# Altium PCB w31_20172_1st_PCB.PcbDoc
Units mil, origin at the board's own origin, x right, y up, seen from the top; angles counter-clockwise.
Board outline 2025 x 1110 mil, 2 copper layers (Top Layer, Bottom Layer); 10 components, 27 nets, 64 pads, 1 vias.
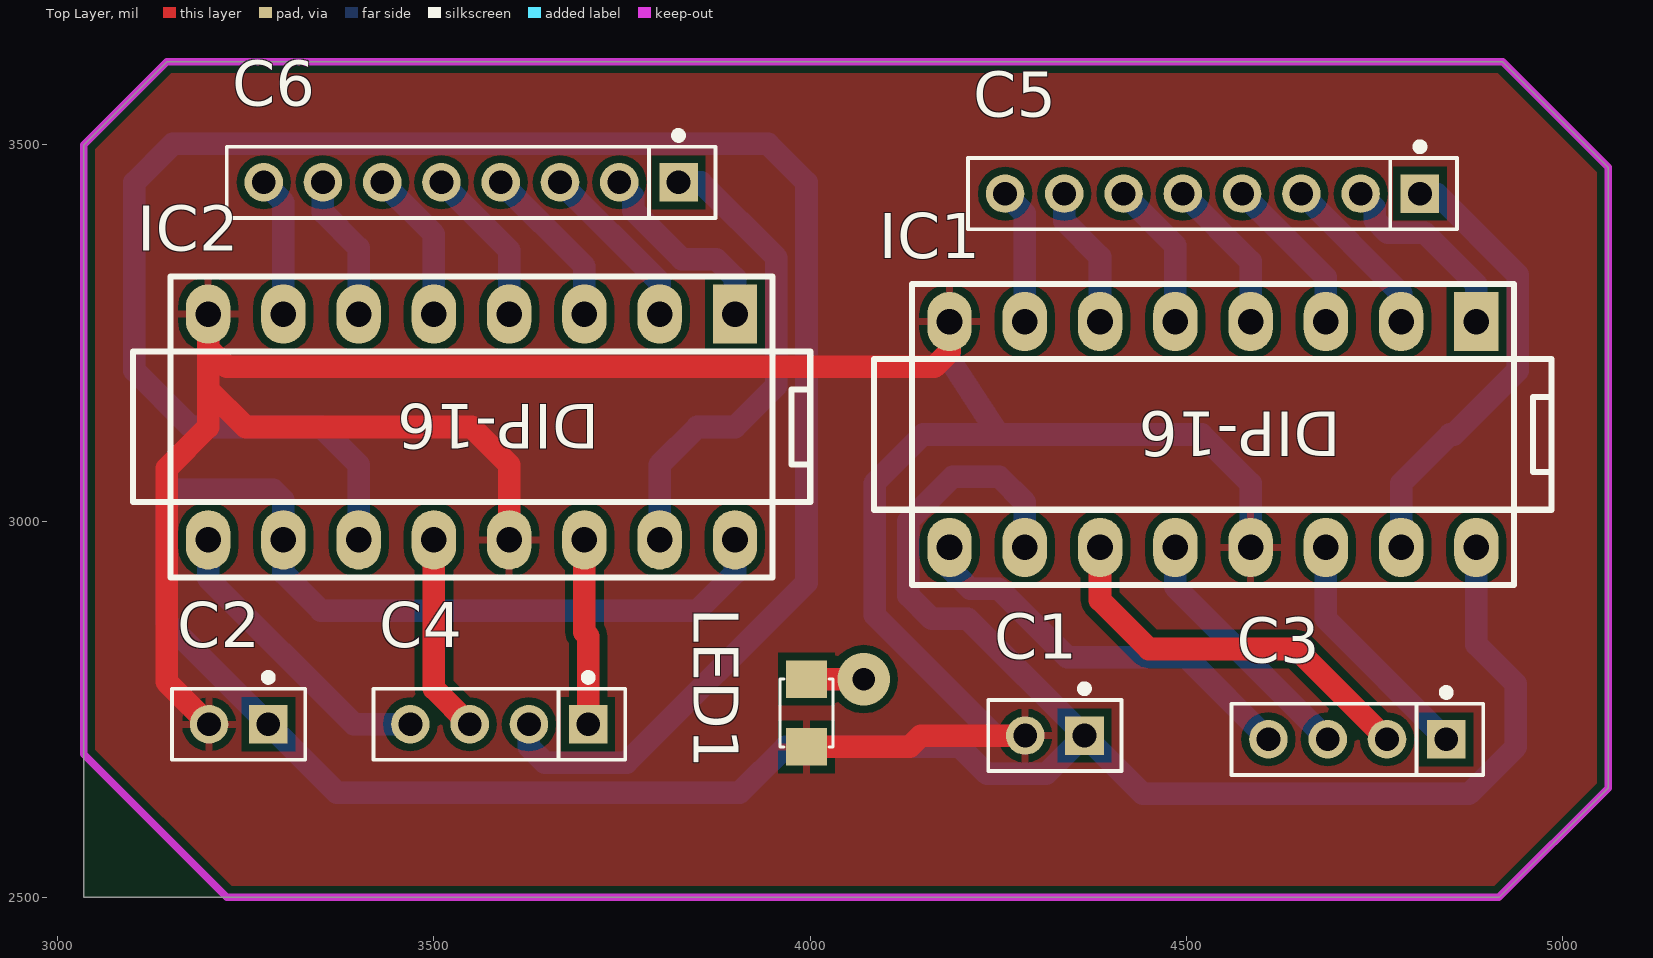
[diagram p0: Top Layer view]
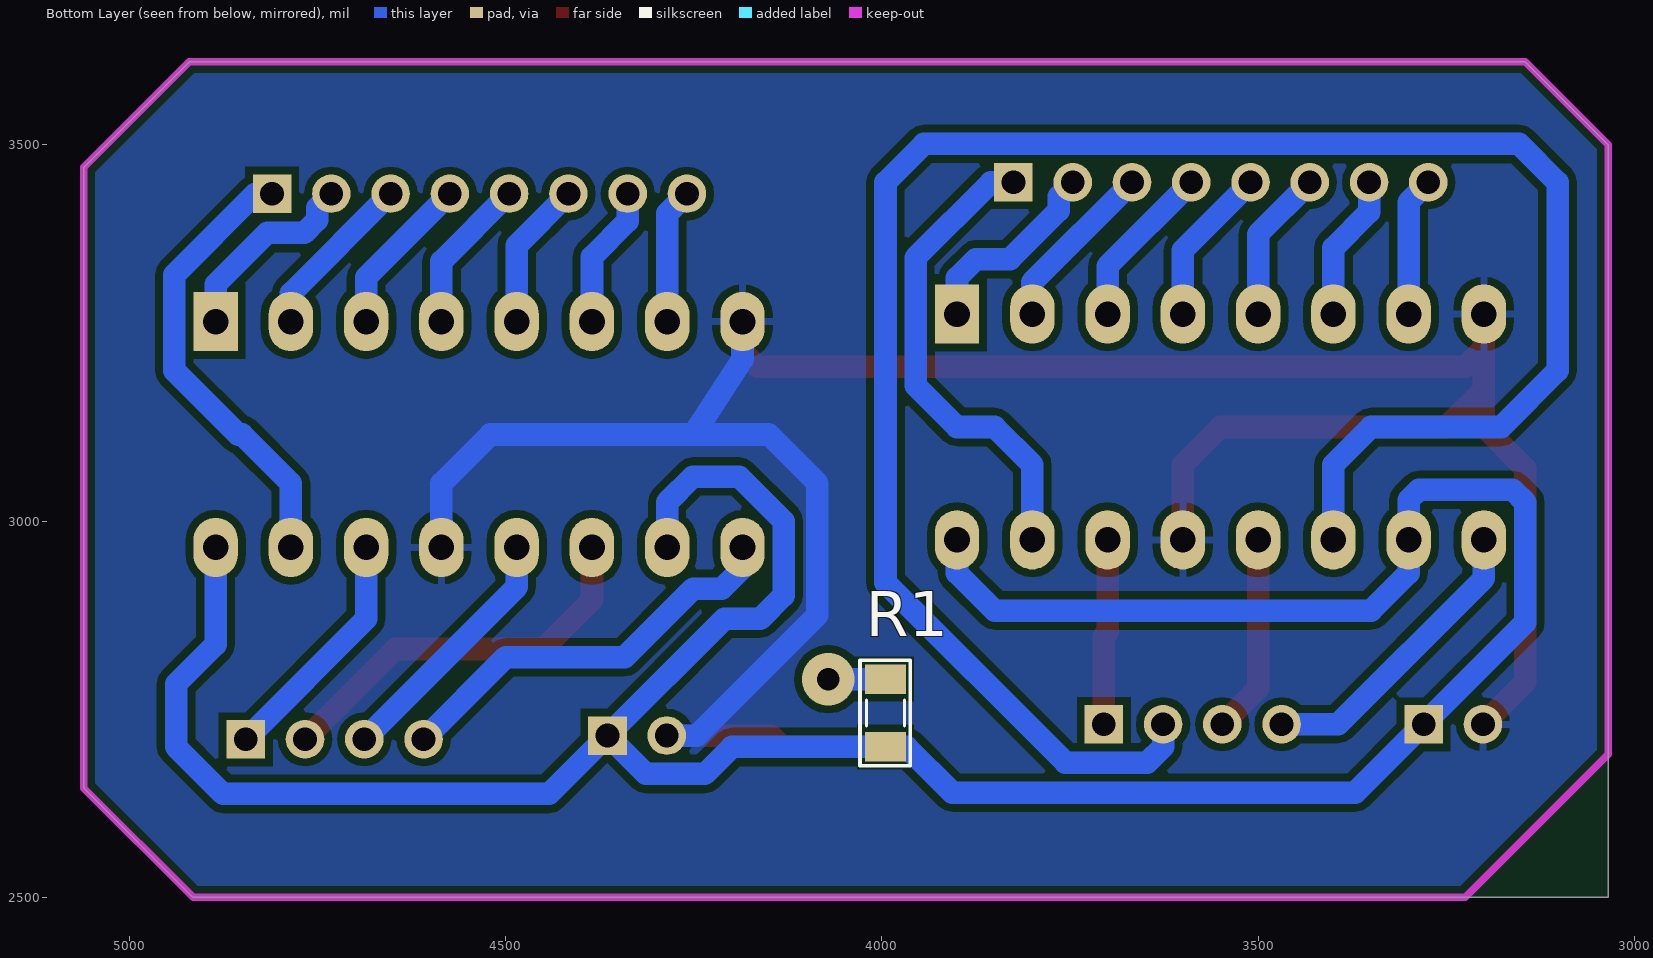
[diagram p1: Bottom Layer view, seen from below]
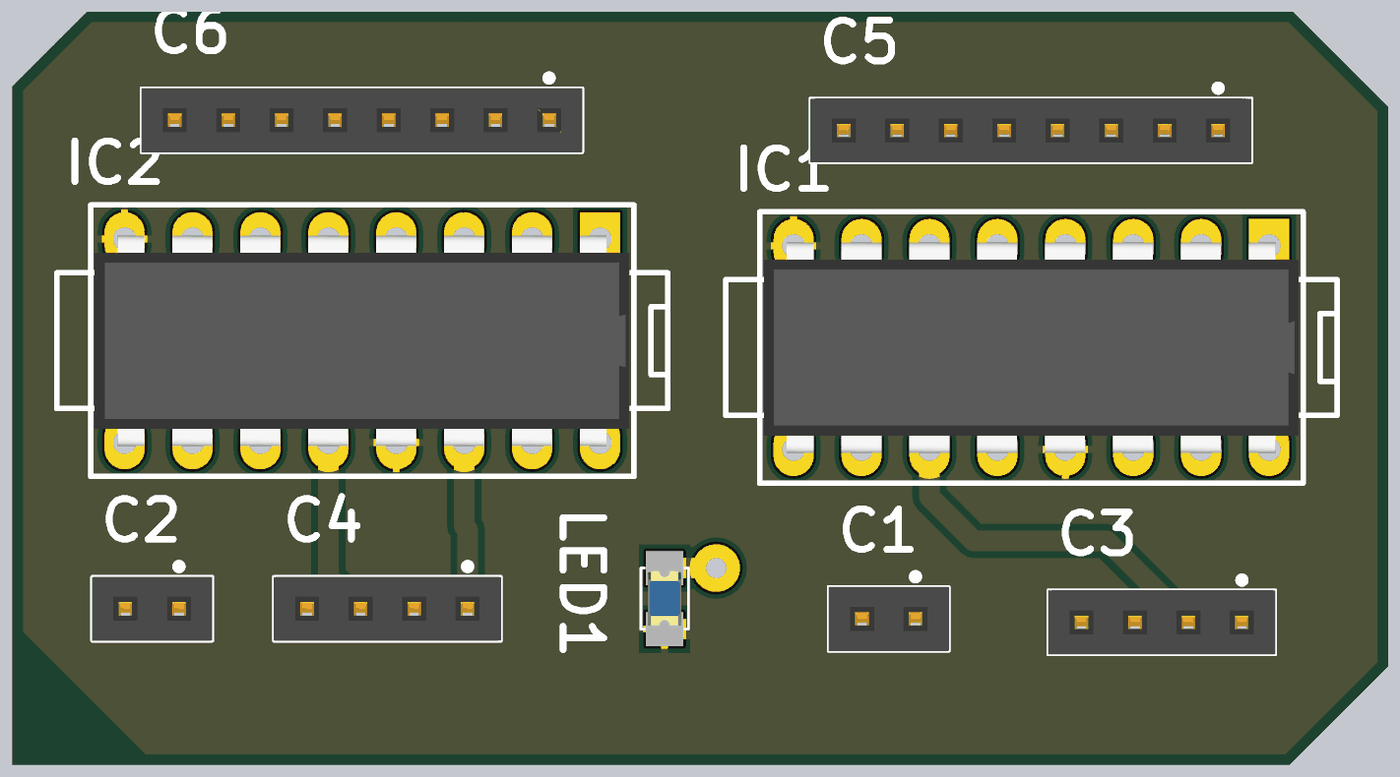
[diagram p2: 3D render of the assembled board from above, using the file's embedded part models]

## Layer stack, top to bottom
Top Solder: solder mask 0.4, Solder Resist, Dk 3.5
Top Layer: signal copper 1.4
Dielectric 1: dielectric 12.6, FR-4, Dk 4.8
Bottom Layer: signal copper 1.4
Bottom Solder: solder mask 0.4, Solder Resist, Dk 3.5

## Board outline
3035,2500 3035,3500 3145,3610 4920,3610 5060,3470 5060,2645 4915,2500

## Design rules (kind name [scope] priority, off if disabled: settings)
Clearance Clearance_2 [All] p1: gap=10
Clearance Clearance_1 [All] p2: gap=10
Clearance [All] p3: gap=30
PolygonConnect [All] p1: connectstyle=Relief reliefconductorwidth=10 reliefentries=4 polygonreliefangle="90 Angle" airgapwidth=10
RoutingVias [All] p1: holewidth=30 width=70 viastyle="Through Hole" minholewidth=30 minwidth=50 maxholewidth=30 maxwidth=80
SolderMaskExpansion [All] p1: expansion=4
Width [All] p1: maxlimit=35 minlimit=15 preferedwidth=30 minimp=50.000000 maximp=50.000000 favimp=50.000000
30 further rules are at their usual default settings.

## Classes and differential pairs
component class w31_20172_1st_Schematic: C1 C2 C3 C4 C6 IC1 IC2 LED1 R1

## Components (designator, comment, footprint, x,y, rotation, side; value= is the part's Value field where it differs from the comment)
C1 "JP2x1-2.0" J2-C1T 4325,2715 r180 top
C2 "JP2x1-2.0" J2-C1T 3240.63,2730 r180 top
C3 "JP4x1-2.0" J4-C1T 4726.89,2710 r180 top
C4 "JP4x1-2.0" J4-C1T 3586.89,2730 r180 top
C5 "JP8x1-2.0" J8-C1T 4534.41,3435 r180 top
C6 "JP8x1-2.0" J8-C1T 3549.41,3450 r180 top
IC1 "74HC595" DIP16 4534.71,3114.92 r180 top
IC2 "74HC595" DIP16 3549.71,3124.92 r180 top
LED1 "LED" LED-0805-Blue 3995,2790 r270 top
R1 "Res" RES-SMD-0805 3995,2745 r270 bottom

## Footprints (in the part's own frame and the unit in brackets; to place one, negate y for a bottom-side part, rotate by r counter-clockwise, add the part's x,y. Pads: shape width x height; smd on the part's side, far side on the other; paste and mask are expansions set on the pad)
DIP16 [mm]
  rect 1.5x2 hole 0.864: 1(-8.897,-3.812)
  oval 1.5x2 hole 0.864: 2(-6.357,-3.812) 3(-3.817,-3.812) 4(-1.277,-3.812) 5(1.263,-3.812) 6(3.803,-3.812) 7(6.343,-3.812) 8(8.883,-3.812) 9(8.883,3.808) 10(6.343,3.808) 11(3.803,3.808) 12(1.263,3.808) 13(-1.277,3.808) 14(-3.817,3.808) 15(-6.357,3.808) 16(-8.897,3.808)
  silkscreen extent -11.44,-5.08 11.42,5.08, body extent -10,-3.93 10,3.94, height 1.99
J2-C1T [mm] "2p, 1 row, straight, gold plating"
  rect 1.3x1.3 hole 0.8: 1(-1,0)
  round 1.3 hole 0.8: 2(1,0)
  silkscreen extent -2.25,-1.71 2.25,1.2, body extent -2.25,-1.2 2.25,1.2, height 4.31
J4-C1T [mm] "4p, 1 row, straight, gold plating"
  rect 1.3x1.3 hole 0.8: 1(-3,0)
  round 1.3 hole 0.8: 2(-1,0) 3(1,0) 4(3,0)
  silkscreen extent -4.25,-1.71 4.25,1.2, body extent -4.25,-1.2 4.25,1.2, height 4.31
J8-C1T [mm] "8p, 1 row, straight, gold plating"
  rect 1.3x1.3 hole 0.8: 1(-7,0)
  round 1.3 hole 0.8: 2(-5,0) 3(-3,0) 4(-1,0) 5(1,0) 6(3,0) 7(5,0) 8(7,0)
  silkscreen extent -8.25,-1.71 8.25,1.2, body extent -8.25,-1.2 8.25,1.2, height 4.31
LED-0805-Blue [mil]
  rect 50x55 smd: 1(0,0) 2(90,0)
  silkscreen extent 0,-35 90,35, body extent 5,-25 85,25, height 43
RES-SMD-0805 [mil]
  rect 39.37x55 smd: 1(-45,0) 2(45,0)
  silkscreen extent -70,-34 70,33, body extent -39,-25 39,25, height 31

## Part data
C1 C2 C3 C4 C5 C6: "WR-PHD 2.00 mm Socket Header"
IC1 IC2: library part 74595, "8 Bit Serial input - Parallel Output"
LED1: library part "LED SMD"
R1: library part Res-SMD, "Resistor"

## Via types
v1: diameter 70, hole 30, Top Layer to Bottom Layer, 1 vias

## Nets (pads, with @x,y where several pads share a name; then routed paths per layer and width w, separated by ;. In a path a pad name is that pad's centre, name@x,y a point inside that pad or via, vN(x,y) a via of type N, cw(c..) or ccw(c..) an arc to the next point about the centre after c; other vN are vias at no path point)
GND: C1.2 C2.2 IC1.8 IC1.13 IC2.8 IC2.13 LED1.2 | length 3722.3
  Top Layer w30: IC2.8 3200,3230 ; C2.2 3145,2786.26 3145,3070 3200,3125 3200,3175 ; IC2.13 3600,3075 3550,3125 3250,3125 3200,3175 ; LED1.2 4132,2700 4147,2715 C1.2 ; IC1.8 4185,3225 4165,3205 3225,3205 3200,3230 ; 3200,3175 3200,3230
  Bottom Layer w30: IC1.8 4185,3215 4250,3115 ; C1.2 4245.63,2715 4085.47,2875.16 4085.47,3050.47 4150,3115 4250,3115 ; IC1.13 4585,3050 4520,3115 4250,3115
NetC3_1: C3.1 IC1.14 | length 321.3
  Bottom Layer w30: IC1.14 4685,2870 C3.1
NetC3_2: C3.2 IC1.11 | length 527.9
  Top Layer w30: IC1.11 4385,2895 4450,2830 4646.26,2830 C3.2
NetC3_3: C3.3 IC1.12 | length 338.9
  Bottom Layer w30: IC1.12 4485,2912.52 C3.3
NetC3_4: C3.4 IC1.9 | length 545.4
  Bottom Layer w30: IC1.9 4185,2937.62 4212.38,2910.25 4250.38,2910.25 4341.63,2819 4499.78,2819 C3.4
NetC4_1: C4.1 IC2.14 | length 247.1
  Top Layer w30: IC2.14 3700,2852 3705,2847 C4.1
NetC4_2: C4.2 IC2.11 | length 2673.5
  Bottom Layer w30: IC2.11 3400,3075 3350,3125 3177,3125 3102,3200 3102,3450 3153,3501 3944,3501 3995,3450 3995,2918 3756,2679 3647.26,2679 3626.26,2700 C4.2
NetC4_3: C4.3 IC2.12 | length 264.7
  Top Layer w30: IC2.12 3500,2777.52 C4.3
NetC4_4: C4.4 IC2.9 | length 400.3
  Bottom Layer w30: IC2.9 3200,2923.75 3393.75,2730 C4.4
NetC5_1: C5.1 IC1.15 | length 603.9
  Bottom Layer w30: IC1.15 4785,3050 4850,3115 4855,3115 4940,3200 4940,3327 4832,3435 C5.1
NetC5_2: C5.2 IC1.1 | length 262.6
  Bottom Layer w30: C5.2 4750.12,3416.14 4750.12,3400 4767.31,3382.82 4816.68,3382.82 4885,3314.5 IC1.1
NetC5_3: C5.3 IC1.2 | length 224.9
  Bottom Layer w30: C5.3 4785,3302.52 IC1.2
NetC5_4: C5.4 IC1.3 | length 216.1
  Bottom Layer w30: C5.4 4685,3323.78 IC1.3
NetC5_5: C5.5 IC1.4 | length 207.3
  Bottom Layer w30: C5.5 4585,3345.04 IC1.4
NetC5_6: C5.6 IC1.5 | length 198.5
  Bottom Layer w30: C5.6 4485,3366.3 IC1.5
NetC5_7: C5.7 IC1.6 | length 189.6
  Bottom Layer w30: C5.7 4337.56,3398.44 4385,3351 IC1.6
NetC5_8: C5.8 IC1.7 | length 180.8
  Bottom Layer w30: C5.8 4285,3408.82 IC1.7
NetC6_1: C6.1 IC2.15 | length 639.9
  Bottom Layer w30: IC2.15 3800,3075 3850,3125 3900,3125 3955,3180 3955,3350 3855,3450 C6.1
NetC6_2: C6.2 IC2.1 | length 265.3
  Bottom Layer w30: C6.2 3765.07,3431.19 3765.07,3412.5 3829.57,3348 3875,3348 3900,3323 IC2.1
NetC6_3: C6.3 IC2.2 | length 229.9
  Bottom Layer w30: C6.3 3800,3317.52 IC2.2
NetC6_4: C6.4 IC2.3 | length 221.1
  Bottom Layer w30: C6.4 3700,3338.78 IC2.3
NetC6_5: C6.5 IC2.4 | length 212.3
  Bottom Layer w30: C6.5 3600,3360.04 IC2.4
NetC6_6: C6.6 IC2.5 | length 203.5
  Bottom Layer w30: C6.6 3500,3381.3 IC2.5
NetC6_7: C6.7 IC2.6 | length 194.6
  Bottom Layer w30: C6.7 3352.56,3410.44 3400,3363 IC2.6
NetC6_8: C6.8 IC2.7 | length 185.8
  Bottom Layer w30: C6.8 3300,3423.82 IC2.7
NetLED1_1: LED1.1 R1.1 | length 152
  Top Layer w30: LED1.1 v1(4071,2790)
  Bottom Layer w30: R1.1 v1(4071,2790)
VCC: C1.1 C2.1 IC1.10 IC1.16 IC2.10 IC2.16 R1.2 | length 4065
  Bottom Layer w30: IC2.16 3900,2931 3850,2881 3350,2881 3300,2931 IC2.10 3300,3028 3286.5,3041.5 3161.5,3041.5 3145,3025 3145,2865 C2.1 3371,2639 3906,2639 3967,2700 R1.2 4199,2700 4235,2664 4313.37,2664 C1.1 ; IC1.10 4285,3025 4251,3059 4189.47,3059 4130.47,3000 4130.47,2901 4161.22,2870.25 4209.12,2870.25 C1.1 ; IC1.16 4885,2836 4937.47,2783.53 4937.47,2700 4874.97,2637.5 4441.87,2637.5 C1.1

## Polygon pours and split planes (outlines as drawn)
GND on Top Layer "GND_L01_P004" (solid, pour order 4): 3145,3610 4920,3610 5060,3470 5060,2645 4915,2500 3225,2500 3035,2690 3035,3500
GND on Bottom Layer "GND_L02_P006" (solid, pour order 6): 3145,3610 4920,3610 5060,3470 5060,2645 4915,2500 3225,2500 3035,2690 3035,3500 3145,3610

## Keep-outs
Keep-Out Layer:
  lines w10: 3035,2690 3035,3500 3145,3610 4920,3610 5060,3470 5060,2645 4915,2500 4665.94,2500 4597.81,2500 4323.75,2500 3571.25,2500 3297.19,2500 3225,2500 3035,2690

## Text inside footprints (layer, text, board x,y; h text height)
IC1: Top Overlay "DIP-16" at 4705,3145 h59.05 r180
IC2: Top Overlay "DIP-16" at 3720,3155 h59.05 r180